# Altium PCB Beacon.PcbDoc
Units mm, origin at the board's own origin, x right, y up, seen from the top; angles counter-clockwise.
Board outline 9.82 x 19.59 mm, 2 copper layers (Top Layer, Bottom Layer), stack 0.871 mm thick; 28 components, 15 nets, 68 pads, 17 vias.
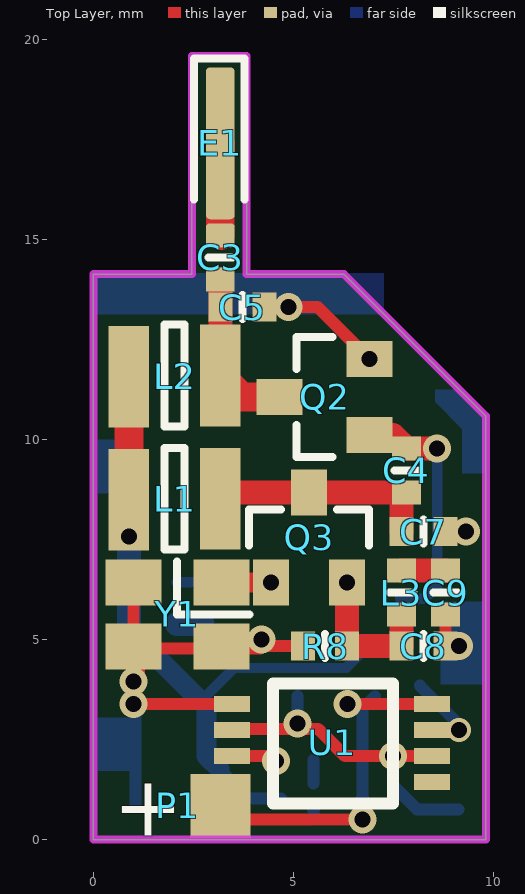
[diagram p0: Top Layer view]
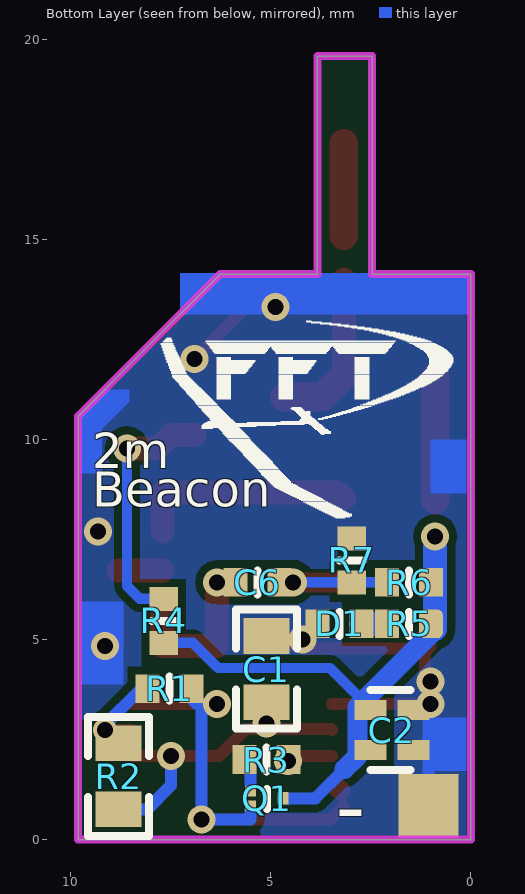
[diagram p1: Bottom Layer view, seen from below]

## Layer stack, top to bottom
Top Layer: signal copper 0.0356
Dielectric: core 0.8, FR-4, Dk 4.8
Bottom Layer: signal copper 0.0356

## Board outline
0,0 0,14.136 2.464,14.136 2.464,19.586 3.833,19.586 3.833,14.136 6.264,14.136 9.817,10.583 9.817,0

## Design rules (kind name [scope] priority, off if disabled: settings)
Clearance Clearance_1 [OnLayer('Keep-Out Layer')] p1: gap=0
Clearance [All] p2: gap=0.2
PlaneConnect [All] p1: planeconnectstyle=Direct reliefexpansion=0.508 reliefentries=4 reliefconductorwidth=0.254 reliefairgap=0.254
PolygonConnect [All] p1: connectstyle=Direct reliefconductorwidth=0.254 reliefentries=4 polygonreliefangle="90 Angle" airgapwidth=0.254
RoutingVias [All] p1: holewidth=0.4 width=0.7 viastyle="Through Hole" minholewidth=0.4 minwidth=0.6 maxholewidth=0.711 maxwidth=1.27
SolderMaskExpansion [All] p1: expansion=0.102
Width [All] p1: maxlimit=0.72 minlimit=0.254 preferedwidth=0.254
27 further rules are at their usual default settings.

## Components (designator, comment, footprint, x,y, rotation, side; value= is the part's Value field where it differs from the comment)
C1 "0.1uF" 0603 5.108,4.262 r270 bottom
C2 "1000pF" CKCL22 2.507,3.235 r270 bottom
C3 "4.7pF" 0402#1 3.175,14.553 r270 top
C4 "10pF" 0402#2 7.829,9.23 r270 top
C5 "33pF" 0402#2 3.725,13.312 r180 top
C6 "22pF" 0402#2 5.334,6.43 r180 bottom
C7 "47pF" 0402#2 8.255,7.7 r180 top
C8 "100pF" 0402#2 8.255,4.834 r180 top
C9 "1000pF" 0402#2 8.805,6.175 r270 top
D1 "LED0" 0402#2 3.279,5.392 r0 bottom
E1 "Antenna" PIN1 3.175,17.406 r0 top
L1 "1uH" 1008 3.175,8.52 r180 top
L2 "1.2uH" 1008 3.175,11.6 r180 top
L3 "0.27uH" 0402#2 7.705,6.175 r90 top
P1 "Header 2" HDR1X2 1.052,0.843 r0 top
Q1 "MMBT3906" sot-923f 5.503,1.21 r270 bottom
Q2 "MMBR951L" sot-23 6.907,10.113 r90 top
Q3 "MMBR951L" sot-23 4.445,6.43 r0 top
R1 "10M" 0402#2 7.536,3.769 r180 bottom
R2 "1M" 0603 8.805,1.577 r90 bottom
R3 "5.1K" 0402#2 5.108,2 r0 bottom
R4 "39K" 0402#2 7.675,5.469 r270 bottom
R5 "3K3" 0402#3 1.544,5.392 r180 bottom
R6 "5.1K" 0402#2 1.544,6.43 r180 bottom
R7 "10K" 0402#2 2.977,6.98 r270 bottom
R8 "330" 0402#2 5.795,4.834 r0 top
U1 "LMC555CM" VSSOP8 5.969,2.413 r270 top
Y1 "48Mhz" "XTAL 3.2X2.5" 2.106,5.63 r180 top

## Footprints (in the part's own frame and the unit in brackets; to place one, negate y for a bottom-side part, rotate by r counter-clockwise, add the part's x,y. Pads: shape width x height; smd on the part's side, far side on the other; paste and mask are expansions set on the pad)
0402#1 [mm] "Chip Resistor, 2-Leads, Body 1,0x0,5mm, IPC Medium Density"
  rrect30% 0.6x0.72 smd: 1(-0.55,0)
  rect 0.6x0.72 smd: 2(0.55,0)
  Top Layer pour cut-out: -0.253,0.36 -0.253,-0.359 0.253,-0.359 0.253,0.36
  silkscreen extent 0,-0.3 0,0.3, body extent -0.55,-0.3 0.55,0.3, height 0.6
0402#2 [mm] "Chip Resistor, 2-Leads, Body 1,0x0,5mm, IPC Medium Density"
  rect 0.6x0.72 smd: 1(-0.55,0) 2(0.55,0)
  Top Layer pour cut-out: -0.253,0.36 -0.253,-0.359 0.253,-0.359 0.253,0.36
  silkscreen extent 0,-0.3 0,0.3, body extent -0.55,-0.3 0.55,0.3, height 0.6
0402#3 [mm] "Chip Resistor, 2-Leads, Body 1,0x0,5mm, IPC Medium Density"
  rect 0.6x0.72 smd: 1(-0.55,0)
  rrect50% 0.6x0.72 smd: 2(0.55,0)
  Top Layer pour cut-out: -0.253,0.36 -0.253,-0.359 0.253,-0.359 0.253,0.36
  silkscreen extent 0,-0.3 0,0.3, body extent -0.55,-0.3 0.55,0.3, height 0.6
0603 [mil]
  rect 35x45 smd: 1(-32.5,0) 2(32.5,0)
  silkscreen extent -58,-30 59,30
1008 [mm]
  rect 1.015x2.54 smd: 1(0,0) 2(2.285,0.03)
  silkscreen extent 0.9,-1.27 1.4,1.27, body extent -0.32,-1.39 2.6,1.4, height 2.48
CKCL22 [mm]
  rect 0.5x0.8 smd mask+0.02: 1(0,0) 2(1,0) 3(1,1.071) 4(0,1.071)
  silkscreen extent -0.5,0 1.5,1
HDR1X2 [mm] "Connector; Header; 2 Position"
  rect 1.5x1.6 smd far side: 1(0,0)
  rect 1.5x1.6 smd: 2(2.126,0)
PIN1 [mm] "Generic Antenna; 1 Lead"
  rrect30% 0.72x3.8 smd: 1(0,0)
  silkscreen extent -0.65,-1.4 0.6,2.13
sot-23 [mm]
  rect 0.9x1.15 smd: 1(0.95,2.25) 2(0,0) 3(1.9,0)
  silkscreen extent -0.55,0.93 2.45,1.83, body extent -0.49,-0.32 2.41,2.48, height 0.94
sot-923f [mm]
  rect 0.26x0.28 smd: 1(0,0) 2(0.36,0)
  rect 0.32x0.28 smd: 3(0.18,0.81)
  silkscreen extent -0.05,0.41 0.45,0.41
VSSOP8 [mm]
  rect 0.4x0.9 smd paste+0: 1(-0.975,-2.5) 2(-0.325,-2.5) 3(0.325,-2.5) 4(0.975,-2.5) 5(0.975,2.5) 6(0.325,2.5) 7(-0.325,2.5) 8(-0.975,2.5)
  silkscreen extent -1.48,-1.48 1.52,1.52
"XTAL 3.2X2.5" [mm]
  rect 1.4x1.15 smd paste+0 mask+0.05: 1(-1.1,-0.8) 2(1.1,-0.8) 3(1.1,0.8) 4(-1.1,0.8)
  silkscreen extent -1.81,-1.33 0.01,0, body extent -1.59,-1.25 1.61,1.25, height 0.91

## Part data
C1 C3 C4 C5 C6 C7 C8 C9: library part Cap, "Capacitor"
C2: library part "CAP ARRAY 2"
D1: "Typical INFRARED GaAs LED"
E1: "Generic Antenna"
L1 L2 L3: library part Inductor, "Inductor"
P1: "Header, 2-Pin"
Q1: "PNP Switching Transistor"
Q2 Q3: library part NPN, "NPN Bipolar Transistor"
R1 R2 R3 R4 R5 R6 R7 R8: library part Res1, "Resistor"
Y1: library part "Xtal 4pin"

## Via types
v1: diameter 0.7/0.7 (per signal layer), hole 0.4, Top Layer to Bottom Layer, 13 vias
v2: diameter 0.7/0.7 (per signal layer), hole 0.4, Top Layer to Bottom Layer, tented bottom, 3 vias
v3: diameter 0.6/0.6 (per signal layer), hole 0.4, Top Layer to Bottom Layer, 1 vias

## Nets (pads, with @x,y where several pads share a name; then routed paths per layer and width w, separated by ;. In a path a pad name is that pad's centre, name@x,y a point inside that pad or via, vN(x,y) a via of type N, cw(c..) or ccw(c..) an arc to the next point about the centre after c; other vN are vias at no path point)
GND: C1.1 C2.3 C2.4 C5.1 C7.1 C8.1 C9.2 D1.2 P1.1 Q2.3 R7.1 R8.1 U1.1 Y1.2 Y1.3 Y1.4 | length 15
  Top Layer w0.3: Y1.2 Y1.3 Y1.3@1.058,4.777 ; v1@1.143,3.388 U1.1 ; v1@1.148,3.947 1.148,4.688 Y1.3@1.058,4.777 ; v1@4.164,4.777 Y1.3@1.058,4.777 ; v1@4.164,4.834 R8.1 ; v1(4.877,13.312) 5.608,13.312 v2(6.907,12.013) ; C8.1 C9.2
  Bottom Layer w0.3: P1.1 1.052,3.297 C2.4@1.143,3.388
  other v1: 1.006,3.388 1.006,3.947 9.144,4.834 4.202,4.997
  other v2: 9.323,7.703
NetC1_2: C1.2 R2.1 U1.2 U1.6 | length 8.6
  Top Layer w0.3: U1.2 3.496,2.765 5.617,2.765 6.294,2.088 v1(7.493,2.088) U1.6
  Bottom Layer w0.3: v1(5.108,2.9) C1.2@5.108,3.585 ; v1(7.493,2.088) 7.493,1.354 8.095,0.751 R2.1@9.126,0.751
NetC3_1: C3.1 E1.1 | length 2.3
  Top Layer w0.72: C3.1 E1.1
NetC3_2: C3.2 C5.2 L2.1 Q2.1 | length 4.1
  Top Layer w0.6: L2.1 C5.2 C3.2
  Top Layer w0.72: L2.1 3.712,11.063 Q2.1
NetC4_1: C4.1 Q2.2 R4.1 | length 6.3
  Top Layer w0.6: Q2.2 7.496,10.113 C4.1 v2(8.598,9.78)
  Bottom Layer w0.254: R4.1 8.276,6.019 8.598,6.34 v2@8.598,9.757
NetC4_2: C4.2 C7.2 L1.1 Q3.1 | length 5.6
  Top Layer w0.6: L1.1 3.335,8.68 Q3.1 7.705,8.68 C7.2
NetC6_1: C6.1 C8.2 L3.1 Q3.3 R8.2 | length 3.7
  Top Layer w0.6: v1(6.345,6.43) R8.2 C8.2 L3.1
NetC6_2: C6.2 Q3.2 R6.1 R7.2 Y1.1 | length 3.6
  Top Layer w0.5: Y1.1 v1(4.445,6.43)
  Bottom Layer w0.254: R6.1@2.078,6.43 2.919,6.43 v1(4.445,6.43)
NetC9_1: C9.1 L3.2 | length 1.1
  Top Layer w0.6: L3.2 C9.1
NetD1_1: D1.1 R5.1 | length 0.6
  Bottom Layer w0.6: R5.1 D1.1
NetQ1_1: Q1.1 R3.2 | length 0.6
  Bottom Layer w0.3: 5.503,1.4 R3.2@5.503,1.985
NetR1_1: R1.1 R2.2 U1.7 | length 2.4
  Top Layer w0.3: U1.7 v3@9.271,2.738
  Bottom Layer w0.3: R1.1@8.164,3.847 R2.2@9.27,2.74
  other v3: 9.144,2.738
OUTPUT: R3.1 U1.3 | length 1.1
  Top Layer w0.3: U1.3 v1@4.572,2.088
  other v1: 4.572,1.961
VCC: C2.1 C2.2 L1.2 L2.2 Q1.3 R4.2 R5.2 R6.2 | length 17.1
  Top Layer w0.72: L1.2 L2.2
  Bottom Layer w0.254: C2.1@2.69,3.455 3.527,4.292 6.323,4.292 6.95,4.919 R4.2
  Bottom Layer w0.3: 3.157,1.76 3.887,1.03 Q1.3
  Bottom Layer w0.5: R5.2@0.889,5.256 C2.1@2.69,3.455 ; C2.1@2.833,3.313 2.833,2.084 3.157,1.76
  Bottom Layer w0.6: R5.2@0.889,5.256 v1(0.889,7.58)
VDD: P1.2 Q1.2 R1.2 U1.4 U1.8 | length 11.2
  Top Layer w0.3: P1.2 3.525,0.496 v1(6.732,0.496) ; v1(6.35,3.388) U1.8
  Top Layer w0.5: P1.2@3.254,1.223 U1.4@3.411,1.38
  Bottom Layer w0.3: Q1.2@5.503,0.742 5.503,0.496 v1(6.732,0.496) 6.732,3.381 ; v1(6.35,3.388) 6.849,3.388 R1.2@7.04,3.578
pads on no net: U1.5

## Polygon pours and split planes (outlines as drawn)
GND on Bottom Layer "Top Layer-No Net" (solid, remove dead copper, pour order 5): 9.817,-0.1 0,-0.1 -0.1,0 -0.1,14.136 6.364,14.136 9.918,10.583

## Keep-outs
Keep-Out Layer:
  the board outline again, w0.2

## Other copper
Bottom Layer:
  region net GND: 8.675,5.944 8.675,3.877 9.75,3.877 9.75,5.944
  region net GND: 7.266,14.162 0.054,14.162 0.054,13.125 7.266,13.125
  region net GND: 1.075,1.709 1.075,3.051 0.11,3.051 0.11,1.709
  region net GND: 1.006,8.652 1.006,9.994 0.108,9.994 0.108,8.652
  region net GND: 9.817,10.583 9.16,11.24 8.543,11.24 8.543,10.941 9.224,10.261 9.224,9.153 9.793,9.153 9.81,9.135

## Silkscreen, mask and mechanical layers (free items; w line width, h text height)
Top Overlay:
  text "+" at 0.502,0.091 h1.52
Bottom Overlay:
  drawing of 459 lines, arcs and shapes, not listed
  text "2m" at 9.464,8.996 h1.5
  text "Beacon" at 9.464,8.034 h1.5
  text "-" at 2.628,0.091 h1.52

## Dimensions
6.264,14.136 to 9.817,0 on Mechanical 2
0,0 to 9.817,0 on Mechanical 2